# Allegro board C112P01-T2-PWR-6V-BJQ-A03.brd
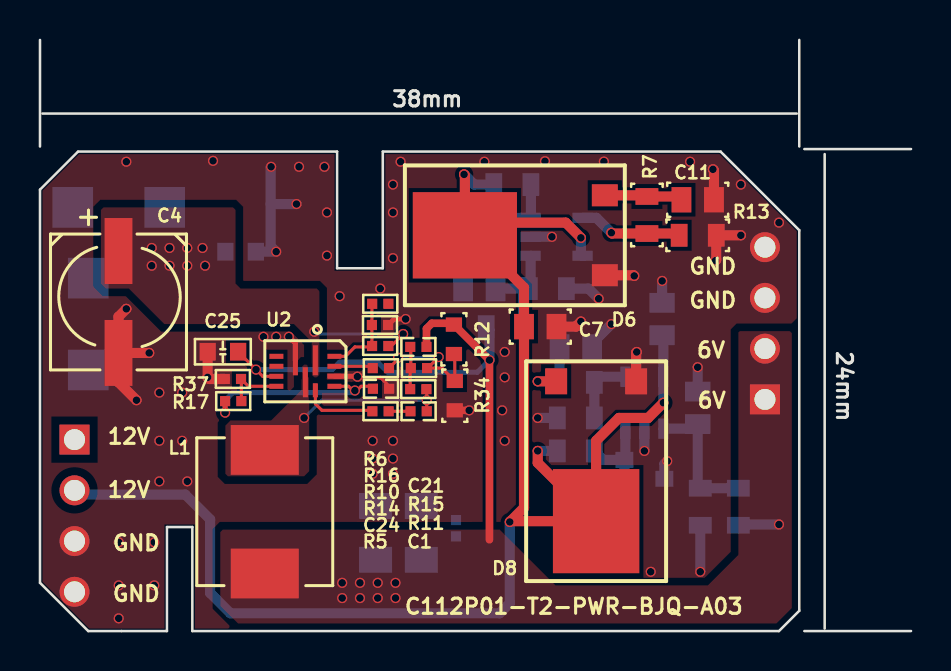
[diagram p0: board, top side]
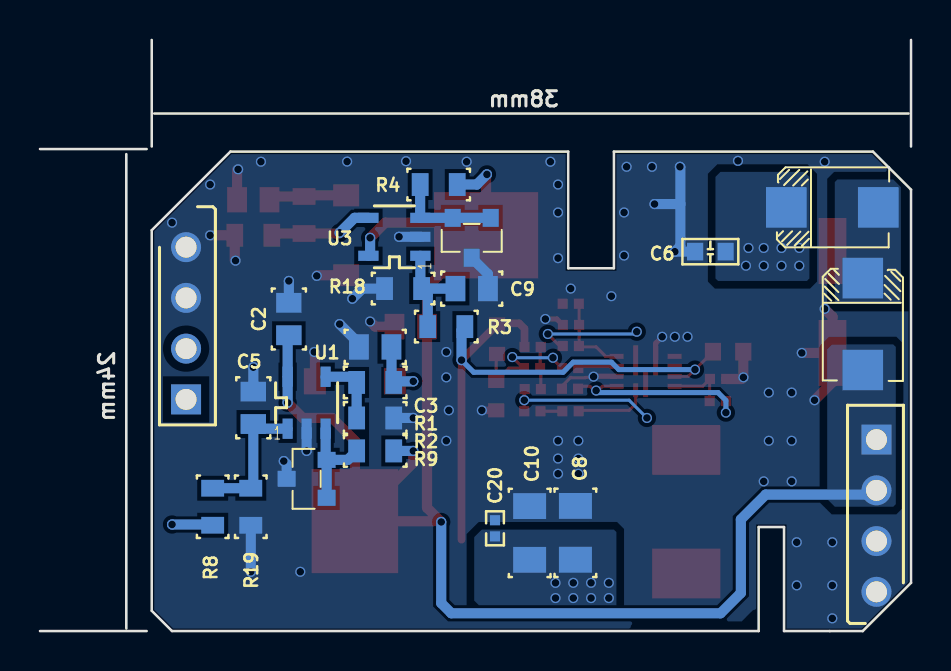
[diagram p1: board, bottom side, seen from below]

Outline 43.56 x 29.59 mm; copper layers: TOP, BOTTOM. Coordinates in mm from the lower left corner of the outline.
Outline path: 0,24.26 0,29.59 ; 0.13,25.91 37.85,25.91 ; 37.97,24.26 37.97,29.59 ; 39.24,23.88 39.24,0.13 ; 43.56,24.13 38.23,24.13 ; 43.56,0 38.23,0 ; 0,22.1 0,2.41 2.41,0 6.35,0 6.35,5.21 7.62,5.21 7.62,0 36.96,0 37.97,1.02 37.97,20.07 34.04,24 17.14,24 17.14,18.16 14.86,18.16 14.86,24 1.91,24 0,22.1

## Design rules (mm)
constraint set DEFAULT: min track width 0.152

## Placement (name value [footprint] x y rotation side)
C1  220NF  [SC0402]  18.94 11 0 top
C2  100NF  [SC0805]  31.11 15.62 270 bottom
C3  100NF  [SC0805]  26.8 14.22 0 bottom
C4  220UF/50V  [SAC6666]  3.93 16.47 270 top
C5  100NF  [SC0805]  32.89 11.18 90 bottom
C6  100NF/50V  [SC0603]  10.03 18.99 0 bottom
C7  100NF  [SC0805]  25.02 15.24 180 top
C8  22UF/25V/NC  [SC1206]  16.78 4.92 90 bottom
C9  100NF  [SC0805]  21.97 17.14 180 bottom
C10  22UF/25V  [SC1206]  19.07 4.91 90 bottom
C11  100NF  [SC0805]  32.89 21.59 0 top
C20  100NF/25V  [SC0402]  20.81 5.14 90 bottom
C21  150PF/NC  [SC0402]  18.92 14.22 0 top
C24  1UF/25V  [SC0402]  17.05 12.13 0 top
C25  100NF/25V  [SC0603]  9.15 13.98 180 top
D5  TL431BI  [SOT23]  30.23 7.62 90 bottom
D6  BT151S-500R  [D-PACK]  21.25 19.81 90 top
D7  TL431BI  [SOT23]  21.97 19.68 0 bottom
D8  BT151S-500R  [D-PACK]  27.81 5.5 180 top
D23  SS36-A  [SMB]  2.41 15.37 90 bottom
D37  SS36-A  [SMB]  3.94 21.21 0 bottom
J1  CON4  [XH-4P-254-1]  1.73 9.58 270 top
J2  CON4  [XH-4P-254-1]  36.26 11.6 90 top
L1  SPM6530T-2R2M  [SPL0707G]  11.24 5.97 270 top
NOREF  -  []  0 24 0 top
R1  100R  [SR0805]  26.8 12.45 180 bottom
R2  1K  [SR0805]  26.8 10.67 0 bottom
R3  18K 1%  [SR0805]  23.24 15.24 180 bottom
R4  10K 1%  [SR0805]  23.62 22.35 180 bottom
R5  3.3R  [SR0402]  17.03 11 0 top
R6  100R/NC  [SR0402]  17.02 16.38 180 top
R7  100R  [SR0805]  30.35 20.83 90 top
R8  18K 1%  [SR0805]  34.92 6.22 270 bottom
R9  10K 1%  [SR0805]  26.8 9.02 180 bottom
R10  1.5MEG  [SR0402]  17.01 14.27 180 top
R11  100K/NC  [SR0402]  18.92 12.11 180 top
R12  41.2K 1%  [SR0603]  20.7 14.6 270 top
R13  1K  [SR0805]  32.89 19.81 180 top
R14  0R  [SR0402]  17.05 13.16 0 top
R15  470R/NC  [SR0402]  18.95 13.16 0 top
R16  470K  [SR0402]  17.01 15.32 0 top
R17  100K  [SR0402]  9.66 11.51 0 top
R18  10K 1%  [SR0805]  25.4 17.14 180 bottom
R19  10K 1%  [SR0805]  33.02 6.22 90 bottom
R34  4.42K 1%  [SR0603]  20.74 11.78 270 top
R37  100K/NC  [SR0402]  9.65 12.62 180 top
U1  TPS7333Q/SO_3  [SOT23-5]  30.23 11.43 180 bottom
U2  MP8759GD-Z  [QFN12-0R5-0302-MV]  13.27 13 180 top
U3  TPS7333Q/SO_3  [SOT23-5]  25.84 19.74 90 bottom

## Library data of the parts
C1-C3 C5-C11 C20 C21 C24 C25 = C_4
C4 = CP
D5 = BZX84C10/SOT_3
D6 D8 = BZX84C10/SOT_1
D7 = BZX84C10/SOT_4
D23 D37 = D_A_0
J1 J2 = CON4
L1 = L_0
R1-R4 R7-R9 R13 R18 R19 = R-0603
R5 R6 R10-R12 R14-R17 R34 R37 = R_2
U1 U3 = TPS7333Q/SO_0
U2 = MP8759_1

## Footprints (pads in the part's own frame, mm; a bottom-side part is the same pattern mirrored in y, then rotated)
D-PACK
  rect 1.1x1.301 smd: 1(-2,-7) 3(2,-7)
  rect 4.32x5.209 smd: 2(0,0)
QFN12-0R5-0302-MV
  rect 0.25x1.5 smd: 1(-0.5,-0.55) 2(0.5,-0.55) 7(0,0.55)
  rect 0.7x0.25 smd: 3(1.45,-0.75) 4(1.45,-0.25) 5(1.45,0.25) 6(1.45,0.75) 9(-1.45,0.75) 10(-1.45,0.25) 11(-1.45,-0.25) 12(-1.45,-0.75)
  rect 0.25x0.7 smd: 8(-0.5,0.95)
SAC6666
  rect 3.302x1.397 smd: 1(-2.551,0) 2(2.551,0)
SC0402
  rect 0.508x0.508 smd: 1(-0.406,0) 2(0.406,0)
SC0603
  rect 0.813x0.889 smd: 1(-0.762,0) 2(0.762,0)
SC0805
  rect 0.991x1.27 smd: 1(-0.813,0) 2(0.813,0)
SC1206
  rect 1.295x1.651 smd: 1(-1.346,0) 2(1.346,0)
SMB
  rect 2.032x2.032 smd: 1(-2.3,0) 2(2.3,0)
SOT23
  rect 0.8x0.9 smd: 1(-0.95,-1) 2(0.95,-1) 3(0,1)
SOT23-5
  rect 0.508x1.016 smd: 1(-0.95,-1.3) 2(0,-1.3) 3(0.95,-1.3) 4(0.95,1.3) 5(-0.95,1.3)
SPL0707G
  rect 2.489x3.404 smd: 1(-3.095,0) 2(3.095,0)
SR0402
  rect 0.508x0.508 smd: 1(-0.406,0) 2(0.406,0)
SR0603
  rect 0.711x0.813 smd: 1(-0.737,0) 2(0.737,0)
SR0805
  rect 0.838x1.143 smd: 1(-0.927,0) 2(0.927,0)
XH-4P-254-1
  rect 1.5x1.5 hole 1.05: 1(0,0)
  round 1.5 hole 1.05: 2(2.54,0) 3(5.08,0) 4(7.62,0)

## Nets
6V0_BD: C8.1(A) C10.1(A) C20.1(A) C21.2(B) C25.1(A) J2.1 J2.2 L1.2(B) R3.2 R8.2 R12.1(A) U2.5(VOUT)
12V0: C2.2(B) C7.2(B) D6.2 D8.2 D23.1(A) J1.1 J1.2 R4.2 R9.2 U1.5(V+) U3.5(V+)
GND: C2.1(A) C3.2(B) C4.2 C5.2(B) C6.2(B) C7.1(A) C8.2(B) C9.2(B) C10.2(B) C11.2(B) C20.2(B) C24.2(B) C25.2(B) D5.3 D6.1 D7.3 D8.1 J1.3 J1.4 J2.3 J2.4 R2.1 R13.1 R16.2(B) R18.1 R19.1 R34.2(B) R37.2(B) U1.2(V-) U2.2(PGND) U2.10(AGND) U3.2(V-)
PD6-1: R6.1(A)
N16884317: C21.1(A) R11.2(B) R15.1(A)
N16884321: R17.2(B) R37.1(A) U2.6(MODE)
N16884327: R6.2(B) R10.2(B) R16.1(A) U2.12(EN)
N16884354: R5.1(A) U2.8(BST)
N16884358: C1.2(B) L1.1(A) R11.1(A) U2.7(SW)
N16884362: R14.1(A) U2.11(FB)
N16884400: C4.1 C6.1(A) D37.2(K) R10.1(A) U2.1(VIN)
N16884597: R12.2(B) R14.2(B) R15.2(B) R34.1(A)
N16884615: C24.1(A) R17.1(A) U2.9(VCC)
N16884627: C1.1(A) R5.2(B)
N17033084: D23.2(K) D37.1(A)
N17081793: C5.1(A) R8.1 R19.2 U1.1(IN+)
N17081801: D5.1 D5.2 R9.1 U1.3(IN-)
N17081857: R1.1 R2.2 U1.4(OUT)
N17081863: C3.1(A) D8.3 R1.2
N17081964: C9.1(A) R3.1 R18.2 U3.1(IN+)
N17081972: D7.1 D7.2 R4.1 U3.3(IN-)
N17082036: R7.1 R13.2 U3.4(OUT)
N17082046: C11.1(A) D6.3 R7.2

Pads without a net: U2 3 4

## Via types
v1: diameter 0.508, hole 0.381, TOP to BOTTOM, 102 vias

## Routing (per net, layer and track width the routed paths; a pad name or vN(x,y) marks a point on that pad's centre or on a via; arc(x,y) is an arc through that point)
6V0_BD: length 32.4
  TOP w0.152: U2.5 11.14,12.75 v1(10.8,13.09) C25.1
  TOP w0.381: 22.48,4.57 v1(22.48,13.56) R12.1 20.63,15.41 19.6,15.41 19.33,15.14 C21.2
  BOTTOM w0.254: v1(22.48,13.56) 21.87,12.95 17.4,12.95 16.89,13.46 14.99,13.46 14.61,13.09 v1(10.8,13.09)
  BOTTOM w0.508: v1(36.96,5.33) 34.96,5.33 R8.2 ; R3.2 22.48,15.07 v1(22.48,13.56)
  vias: v1(15.11,2.41) v1(15.11,1.65) v1(16,2.41) v1(16,1.65) v1(16.89,2.41) v1(16.89,1.65) v1(17.78,2.41) v1(17.78,1.65)
12V0: length 80.2
  TOP w0.508: v1(21.21,22.86) 21.25,22.82 D6.2 21.59,19.81 ; v1(24.89,9.02) 24.89,8.42 D8.2 ; 23.54,5.5 v1(23.5,5.46) ; 23.54,5.5 D8.2 ; 23.54,5.5 24.21,6.17 C7.2 24.21,17.2 21.59,19.81 ; v1(31.18,11.43) 30.41,10.67 28.96,10.67 27.81,9.52 D8.2 ; 21.59,19.81 21.59,19.94 22.1,20.45 26.29,20.45 v1(27.05,19.68)
  BOTTOM w0.508: R4.2 21.72,22.35 v1(21.21,22.86) ; J1.2 1.94,6.83 7.26,6.83 8.51,5.59 8.51,1.9 9.53,0.89 22.99,0.89 23.5,1.4 v1(23.5,5.46) ; v1(27.05,19.68) 27.05,18.87 U3.5 ; C2.2 31.18,14.75 U1.5 v1(31.18,11.43) ; R9.2 v1(24.89,9.02)
GND: length 44
  TOP w0.152: v1(15.88,12.74) 15.91,12.7 16.27,12.7 16.29,12.68 16.99,12.68 17.01,12.7 17.02,12.7 17.46,12.26 C24.2
  TOP w0.254: v1(15.88,12.74) 15.88,12.7 15.75,12.7 15.69,12.75 U2.10 ; R16.2 17.71,15.62 v1(18.29,15.62) ; U2.2 12.77,14.41 v1(12.45,14.73)
  TOP w0.381: R34.2 v1(21.46,11.05)
  TOP w0.508: v1(33.66,23.11) 33.71,23.06 C11.2 ; C7.1 26.8,15.24 v1(27.05,15.49) ; v1(35.05,19.81) R13.1 33.82,18.58 v1(33.78,18.54) ; v1(4.32,16.13) 3.93,15.74 C4.2 ; C25.2 8.38,12.7 v1(8.38,12.7) 8.46,12.62 R37.2 ; v1(29.84,13.97) 29.81,13.94 D8.1 ; C4.2 v1(5.46,13.92) ; C4.2 3.93,12.46 v1(4.83,11.56) ; v1(29.72,17.78) 29.69,17.81 D6.1
  BOTTOM w0.508: 11.54,21.38 11.54,23.22 v1(11.56,23.24) ; 11.54,21.38 11.54,19.27 v1(11.81,18.99) C6.2 ; 11.54,21.38 v1(12.83,21.38) ; v1(33.02,2.97) R19.1 ; U1.2 v1(30.23,9.02) ; U3.2 v1(25.6,19.74) ; R2.1 v1(24.89,10.67) ; v1(27.94,16.64) 27.43,17.14 R18.1 ; C3.2 27.61,14.4 v1(28.57,15.37) ; C2.1 v1(31.11,17.53) ; D7.3 21.16,17.87 C9.2 ; D5.3 31.23,8.37 v1(31.37,8.51) ; C5.2 v1(32.89,13.21)
  vias: v1(3.94,4.45) v1(3.94,2.29) v1(3.94,0.63) v1(4.32,23.49) v1(5.71,4.45) v1(5.71,2.29) v1(5.97,11.94) v1(5.97,9.52) v1(5.97,7.49) v1(7.11,11.94) v1(7.11,9.52) v1(7.37,7.49) v1(8.65,23.54) v1(11.18,14.73) v1(11.81,14.73) v1(12.95,23.24) v1(14.22,23.24) v1(14.35,20.95) v1(14.35,18.8) v1(14.99,16.76) v1(16.64,9.52) v1(16.64,8.64) v1(16.64,7.87) v1(17.02,17.14) v1(17.65,22.35) v1(17.65,20.95) v1(17.65,18.67) v1(17.65,9.52) v1(17.65,8.64) v1(17.65,7.87) v1(18.03,23.49) v1(22.23,23.49) v1(23.11,11.05) v1(23.24,13.97) v1(23.24,12.7) v1(23.24,9.52) v1(25.26,23.52) v1(28.2,23.5) v1(30.54,2.97) v1(32.51,23.49) v1(35.05,22.35) v1(36.96,20.45)
N16884317: length 2.1
  TOP w0.152: C21.1 18.55,14.19 R15.1 18.51,13.13 R11.2
N16884321: length 3
  TOP w0.152: 10.07,12.6 R37.1 ; 10.07,12.6 10.42,12.25 U2.6 ; 10.07,12.6 R17.2
N16884327: length 4.2
  TOP w0.152: R6.2 16.6,16.37 R16.1 16.6,14.28 R10.2 16.56,14.22 15.75,14.22 15.28,13.75 U2.12
N16884354: length 3.7
  TOP w0.152: R5.1 16.58,11.05 14.1,11.05 13.77,11.37 U2.8
N16884358: length 7.6
  TOP w0.152: R11.1 19.34,12.09 v1(19.34,11.56) C1.2
  BOTTOM w0.152: v1(13.21,10.67) 14.1,11.56 v1(19.34,11.56)
N16884362: length 2
  TOP w0.152: R14.1 16.55,13.25 U2.11
N16884400: length 5.5
  TOP w0.152: v1(18.16,14.87) 18.16,14.86 17.57,14.27 R10.1
  BOTTOM w0.152: v1(18.16,14.87) 13.83,14.87 v1(13.72,14.99)
  vias: v1(5.59,19.18) v1(5.59,18.29) v1(6.48,19.18) v1(6.48,18.29) v1(7.37,19.18) v1(7.37,18.29) v1(8.13,19.18) v1(8.25,18.29)
N16884597: length 6.6
  TOP w0.152: R15.2 19.38,13.16 ; 19.38,13.16 20.1,13.16 R34.1 20.74,13.82 R12.2 ; 19.38,13.16 v1(19.94,13.72) ; v1(17.91,13.68) 17.91,13.61 R14.2
  BOTTOM w0.152: v1(17.91,13.68) 19.91,13.68 v1(19.94,13.72)
N16884615: length 10.2
  TOP w0.152: U2.9 15.43,12.25 15.75,11.94 ; 15.75,11.94 16.06,12.25 16.52,12.25 C24.1 ; 15.75,11.94 v1(15.75,12.04)
  TOP w0.254: R17.1 v1(9.26,10.93)
  BOTTOM w0.254: v1(15.75,12.04) 15.65,11.94 9.65,11.94 9.26,11.54 v1(9.26,10.93)
N16884627: length 1.1
  TOP w0.152: R5.2 C1.1
N17081793: length 7
  BOTTOM w0.508: R8.1 R19.2 32.89,7.28 C5.1 32.66,10.13 U1.1
N17081801: length 5.2
  BOTTOM w0.508: U1.3 29.28,8.62 D5.2 ; D5.1 D5.2 ; D5.2 28.17,8.57 R9.1
N17081857: length 3.4
  BOTTOM w0.508: R2.2 R1.1 28.01,12.73 U1.4
N17081863: length 3.7
  TOP w0.508: D8.3 v1(24.89,12.5)
  BOTTOM w0.508: v1(24.89,12.5) D8.3 R1.2 25.98,12.56 C3.1
N17081964: length 5.4
  BOTTOM w0.508: R18.2 C9.1 ; R18.2 24.54,17.21 U3.1 ; R18.2 24.17,16.84 R3.1
N17081972: length 5.2
  BOTTOM w0.508: R4.1 24.55,20.7 U3.3 24.54,20.68 D7.2 D7.1
N17082036: length 5.2
  TOP w0.508: v1(28.57,19.94) 28.61,19.9 R7.1 31.88,19.9 R13.2
  BOTTOM w0.508: U3.4 27.83,20.69 v1(28.57,19.94)
N17082046: length 3.9
  TOP w0.508: C11.1 31.92,21.76 R7.2 30.3,21.81 D6.3

## Copper pours and planes (outline as drawn; the poured copper is in the pictures)
6V0_BD on TOP: 9.91,0.38 9.02,1.27 9.02,4.95 9.14,5.08 22.99,5.08 25.78,2.29 33.4,2.29 34.92,3.81 34.92,14.94 35,15.01 37.5,15.01 37.6,14.91 37.6,1.15 36.83,0.38
6V0_BD on BOTTOM: 14.73,4.95 14.73,1.27 14.99,1.02 21.34,1.02 21.84,1.52 21.84,4.7 21.46,5.08 14.86,5.08
12V0 on BOTTOM: 0.76,14.22 0.76,6.35 0.89,6.22 3.81,6.22 4.19,6.6 4.19,14.1 3.94,14.35 0.89,14.35
GND on TOP: 12.7,12.7 12.83,12.7 12.95,12.83 12.95,14.6 12.57,14.99 10.92,14.99 10.79,14.86 10.79,14.35 10.92,14.22 12.32,14.22 12.57,13.97 12.57,12.83
GND on TOP: 2.47,0.13 0.13,2.47 0.13,22.05 1.96,23.88 14.73,23.88 14.73,18.03 17.27,18.03 17.27,23.88 33.98,23.88 37.85,20.01 37.85,15.66 37.56,15.37 37.56,15.36 37.54,15.34 34.85,15.34 34.64,15.13 34.64,0.13 7.75,0.13 7.75,5.33 6.22,5.33 6.22,0.13 ; 5 cut-outs
GND on TOP: 15.49,9.91 15.49,5.84 15.88,5.46 21.59,5.46 21.84,5.71 21.84,9.91 21.59,10.16 15.75,10.16
GND on BOTTOM: 2.47,0.13 0.13,2.47 0.13,22.05 1.96,23.88 14.73,23.88 14.73,18.03 17.27,18.03 17.27,23.88 33.98,23.88 37.85,20.01 37.85,1.07 36.9,0.13 7.75,0.13 7.75,5.33 6.22,5.33 6.22,0.13 ; 1 cut-out
GND on BOTTOM: 15.88,9.91 15.88,5.71 16.26,5.33 21.59,5.33 21.72,5.46 21.72,9.91 21.59,10.03 16,10.03
N16884358 on TOP: 9.4,7.75 13.21,7.75 13.46,8 13.46,13.21 13.34,13.33 13.21,13.33 13.08,13.21 13.08,12.06 11.56,10.54 9.53,10.54 9.27,10.29 9.27,7.87
N16884400 on TOP: 3.05,21.08 3.05,17.4 3.3,17.14 4.45,17.14 6.22,15.37 12.7,15.37 13.59,14.48 13.59,12.83 13.72,12.7 13.84,12.7 13.97,12.83 13.97,17.02 13.84,17.14 10.03,17.14 9.78,17.4 9.78,21.08 9.65,21.21 3.17,21.21
N16884400 on BOTTOM: 5.08,22.73 5.08,17.65 5.21,17.53 9.65,17.53 9.78,17.65 9.78,22.73 9.53,22.99 5.33,22.99
N17033084 on BOTTOM: 0.51,22.22 0.51,16.38 3.68,16.38 3.81,16.51 3.81,22.48 3.68,22.61 0.89,22.61

## Text on the board
Board Geometry/Outline: 38mm | 24mm
Ref Des/Silkscreen Top: 12V | GND | C112P01-T2-PWR-BJQ-A03 | 6V
DEVICE_TYPE_BOTTOM: C112P01-T2-ZDS-PWR-6V-A01
User.10: FIGURE | SIZE | 15.0 | 41.339 | DRILL CHART: TOP to BOTTOM | ALL UNITS ARE IN MILS | TOLERANCE | +2.0/-2.0 | +0.0/-0.0 | PLATED | QTY | 102 | 8
